# EAGLE board RFboardLeiden48_V_0.4 (EAGLE 7.6.0), part 1 of 2
AUTHOR: Kirchschlager Raimund
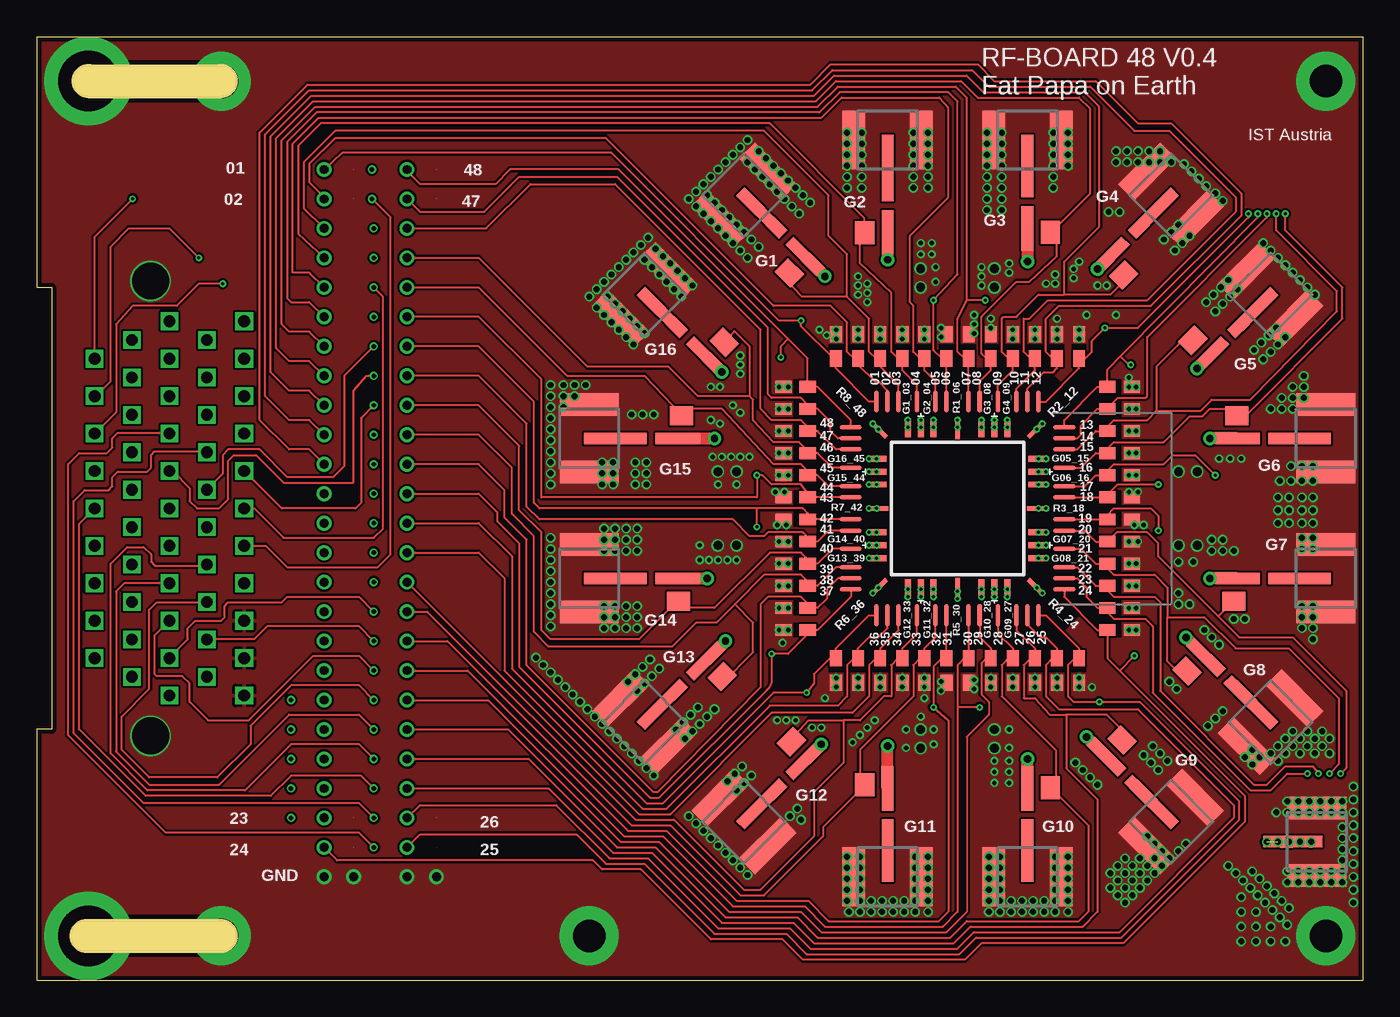
[diagram p0: board, top side]
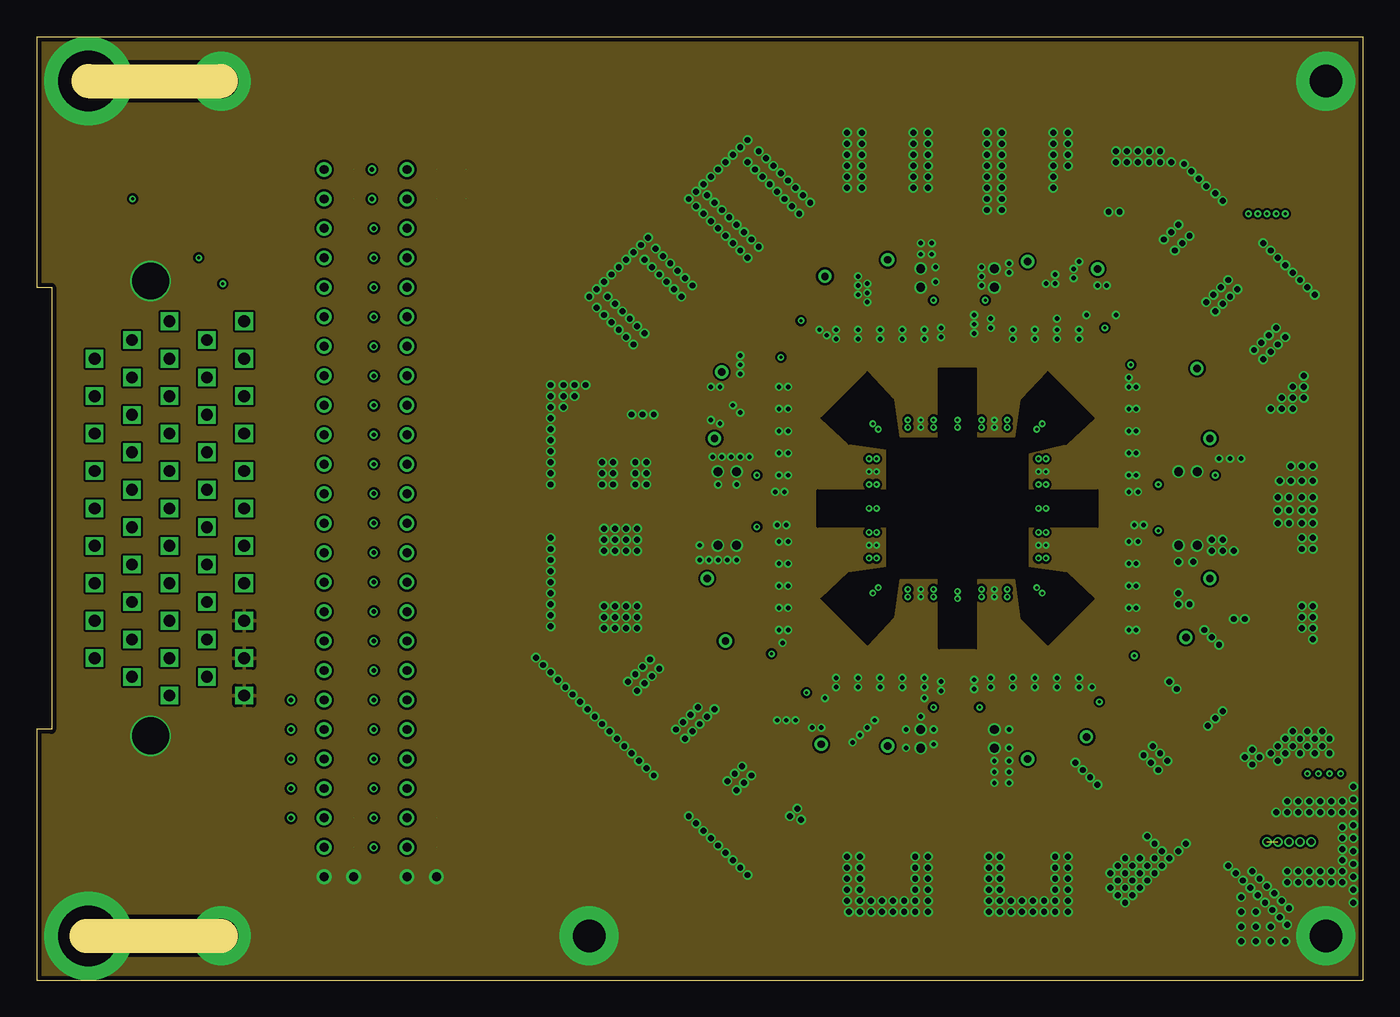
[diagram p1: board, inner layer GND1]
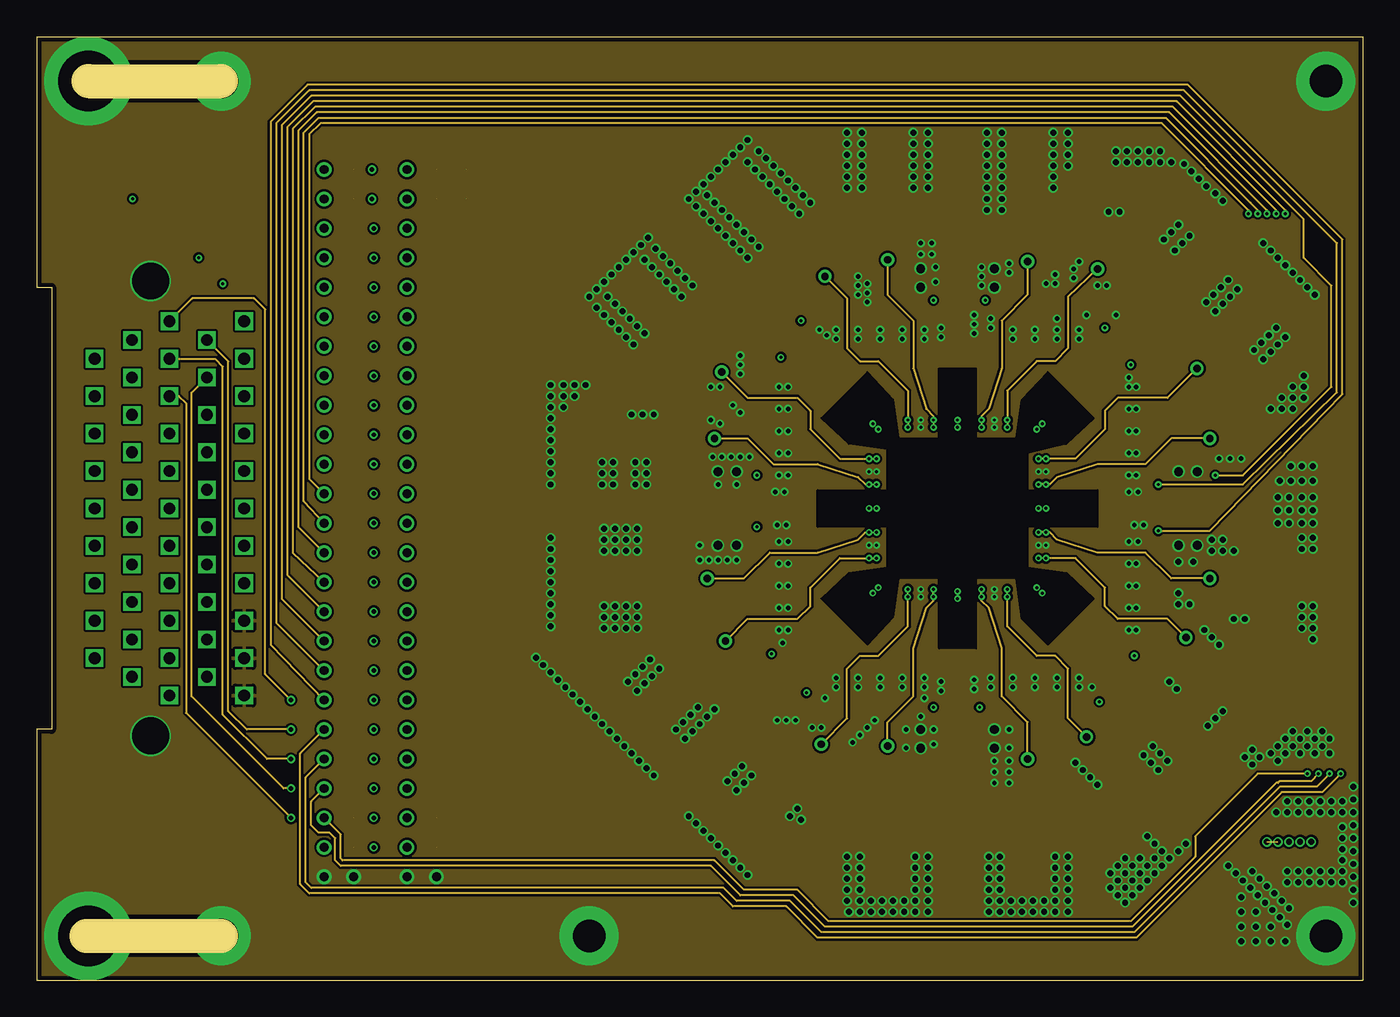
[diagram p2: board, inner layer FAST_GATES]
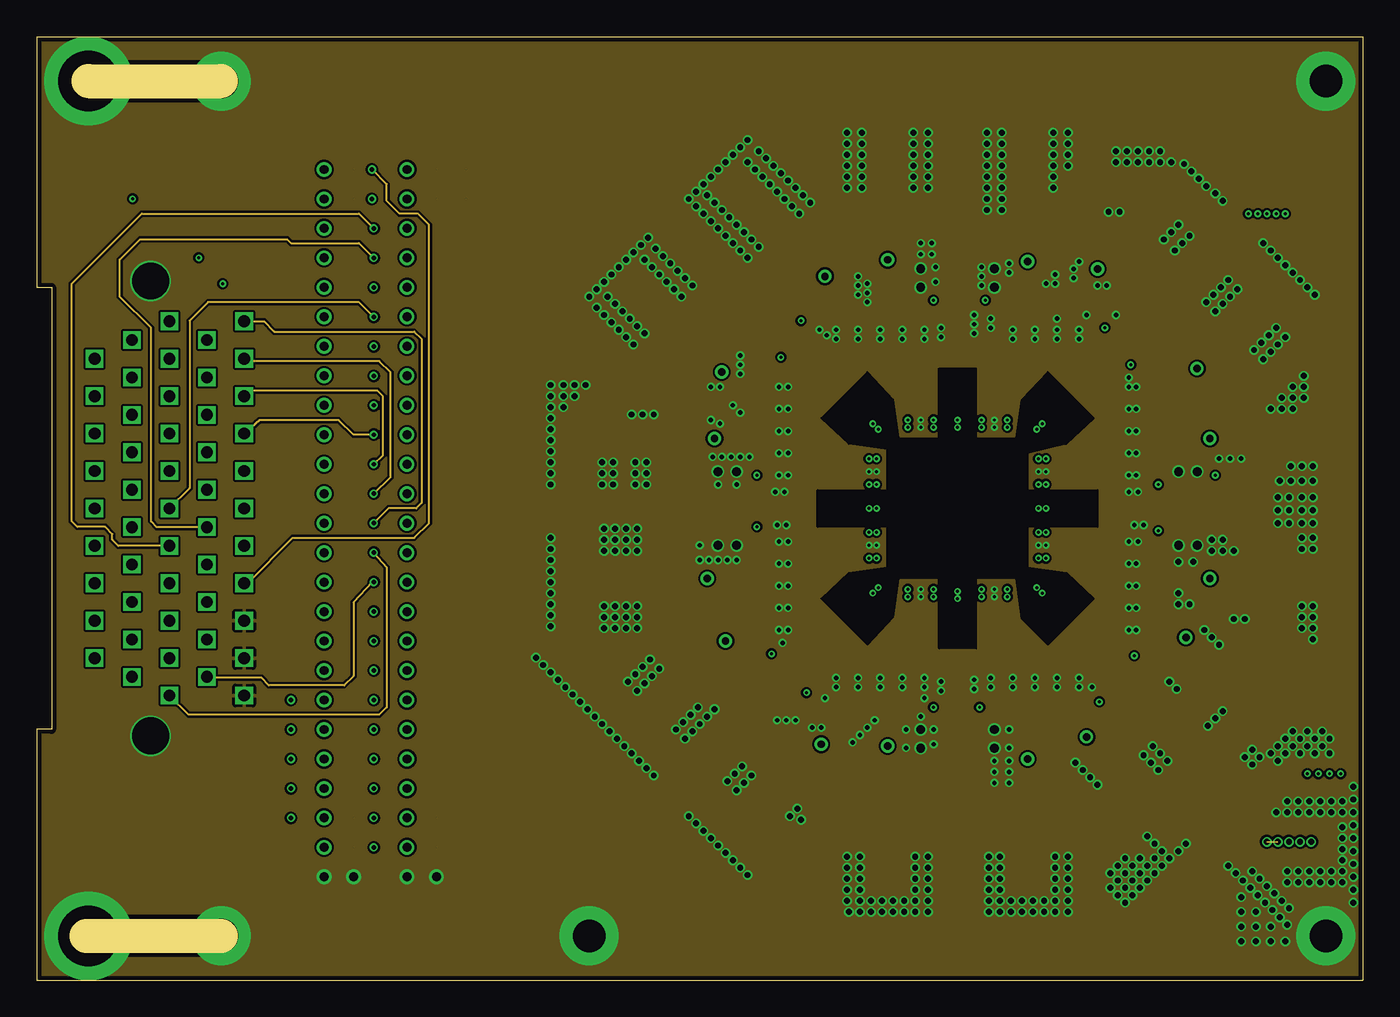
[diagram p3: board, inner layer GND2]
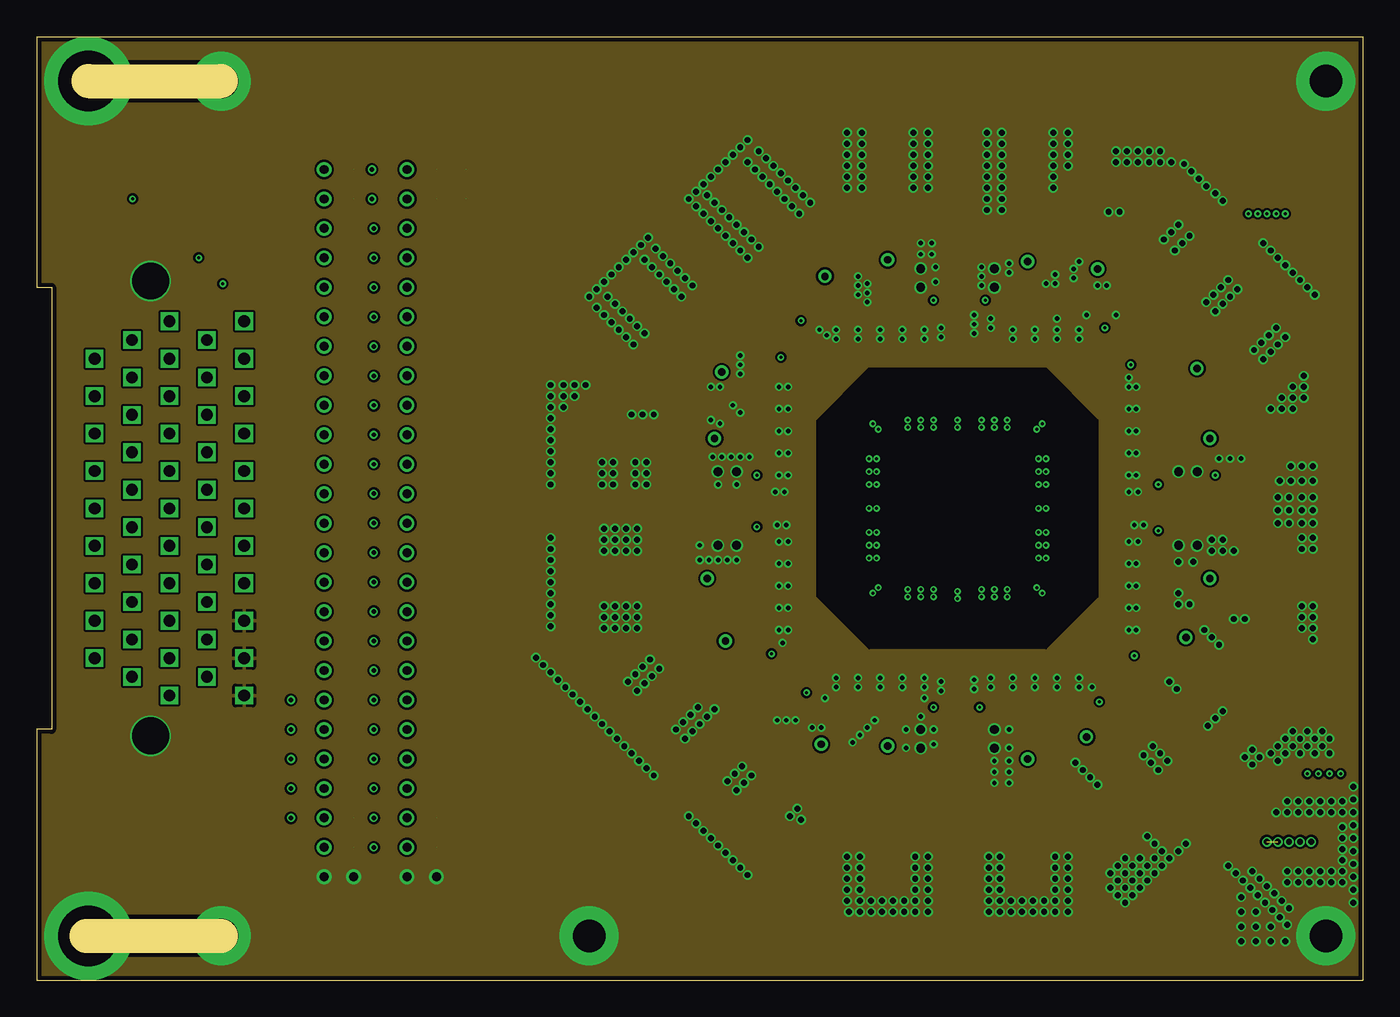
[diagram p4: board, inner layer GND_REFLECTOMETRY]
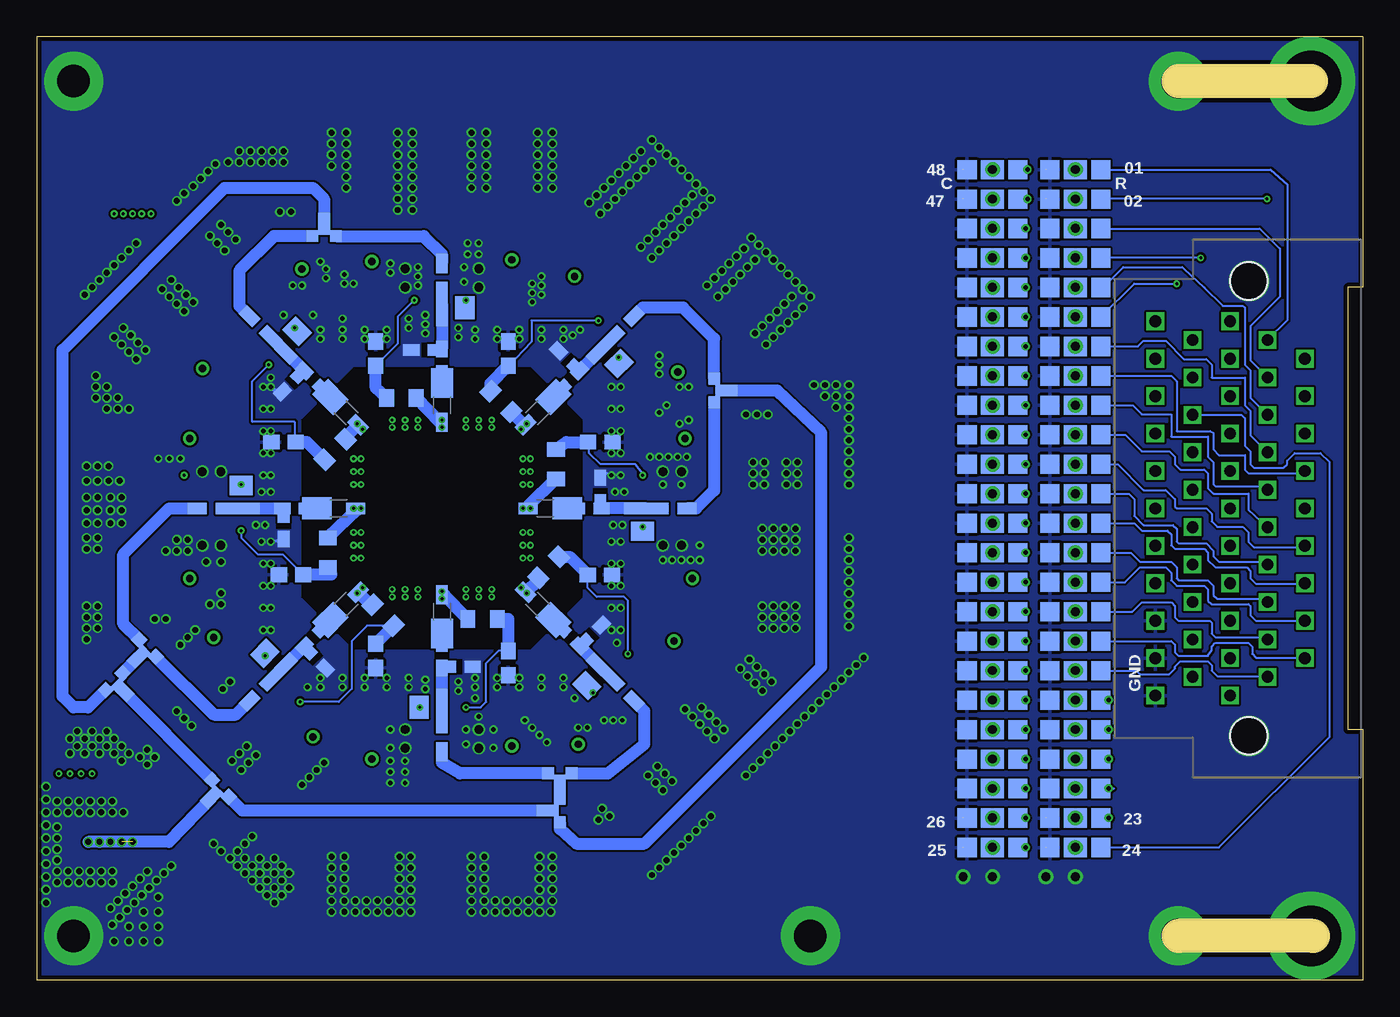
[diagram p5: board, bottom side, seen from below]

Size 90 x 64 mm. Coordinates in mm from the lower left corner, seen from the top.
Outline: 3.38,3 12.5,3
Outline: 3.5,61 12.5,61
Outline: 0,64 0,47 1,47 1,17 0,17 0,0 90,0 90,64 0,64
Copper layers [2:[3:(1+2+3*14+15+16)]]: TOP 0.035mm / dielectric 0.4mm / GND1 0.035mm / dielectric 0.2mm / FAST_GATES 0.035mm / dielectric 0.2mm / GND2 0.035mm / dielectric 0.2mm / GND_REFLECTOMETRY 0.035mm / dielectric 0.4mm / REFLECTOMETRY 0.035mm
Design rules "PCB-POOL HighSpec_ML6+ *": minimum track width 0.125mm, minimum drill 0.2mm, track to track 0.125mm, track to pad 0.125mm, pad to pad 0.125mm, via to via 0.125mm, smd to smd 0.125mm, copper to edge 0.3mm, drill to drill 0.2mm, minimum pad ring 0.2mm, minimum via ring 0.125mm, stop-mask expansion 0.065mm, vias tented up to drill 0.5mm, thermal gap 0.2mm
Net classes: 0 GND: clearance 0.15 mm; 1 HF: width 0.15 mm, clearance 0.25 mm; 2 REFL: width 0.8 mm, clearance 0.8 mm

## Footprints (pad centres in the part's own frame; a part is rotated, then mirrored left to right if it is on the bottom)
BIAS_TEE_UP_0603 = smd 1.3 x 0.8: HF 3.25,0 | smd 1.55 x 1.3: LF 0.25,-1.55 | smd 3 x 0.8: OUT 0.5,0
BIAS_TEE_DOWN_0603 = smd 1.3 x 0.8: HF 3.25,0 | smd 1.55 x 1.3: LF 0.45,1.55 | smd 3 x 0.8: OUT 0.5,0
L_MATCH = smd 2 x 1.5: IN 1.5,0 | smd 1.3 x 0.8: OUT -1.15,0
LP-FILTER/1_STAGE/OS/0603_TOP = smd 1.3 x 1.3: $1 -1.6,0.01; $6 1.85,0.01 | smd 1.55 x 1.3: $4 0.125,0.01
SMP_STRAIGHT_MINI_WIDE = smd 0.8 x 4: 1 0,1.653 | smd 1.524 x 4: 2@1 -2.292,0; 2@2 2.292,0
48DC+24RF_V3.0 = smd 0.3 x 1.5: DC§1 -5.5,7.25; DC§2 -4.75,7.25; DC§3 -4,7.25; DC§4 -2.75,7.25; DC§5 -1.5,7.25; DC§6 -0.75,7.25; DC§7 0.75,7.25; DC§8 1.5,7.25; DC§9 2.75,7.25; DC§10 4,7.25; DC§11 4.75,7.25; DC§12 5.5,7.25; DC§25 5.5,-7.25; DC§26 4.75,-7.25; DC§27 4,-7.25; DC§28 2.75,-7.25; DC§29 1.5,-7.25; DC§30 0.75,-7.25; DC§31 -0.75,-7.25; DC§32 -1.5,-7.25; DC§33 -2.75,-7.25; DC§34 -4,-7.25; DC§35 -4.75,-7.25; DC§36 -5.5,-7.25; RF$06_R1 0,5.45; RF$30_R5 0,-5.45 | smd 1.5 x 0.3: DC§13 7.25,5.5; DC§14 7.25,4.75; DC§15 7.25,4; DC§16 7.25,2.75; DC§17 7.25,1.5; DC§18 7.25,0.75; DC§19 7.25,-0.75; DC§20 7.25,-1.5; DC§21 7.25,-2.75; DC§22 7.25,-4; DC§23 7.25,-4.75; DC§24 7.25,-5.5; DC§37 -7.25,-5.5; DC§38 -7.25,-4.75; DC§39 -7.25,-4; DC§40 -7.25,-2.75; DC§41 -7.25,-1.5; DC§42 -7.25,-0.75; DC§43 -7.25,0.75; DC§44 -7.25,1.5; DC§45 -7.25,2.75; DC§46 -7.25,4; DC§47 -7.25,4.75; DC§48 -7.25,5.5; RF$18_R3 5.45,0; RF$42_R7 -5.45,0 | smd 0.4 x 1.27: RF$03_G1 -3.375,5.45; RF$04_G2 -1.625,5.45; RF$08_G3 1.625,5.45; RF$09_G4 3.375,5.45; RF$27_G9 3.375,-5.45; RF$28_G10 1.625,-5.45; RF$32_G11 -1.625,-5.45; RF$33_G12 -3.375,-5.45; RF$GND -2.5,5.45; RF$GND1 2.5,5.45; RF$GND4 2.5,-5.45; RF$GND5 -2.5,-5.45 | smd 1.5 x 0.3 rotated 45: RF$12_R2 5.35,5.35; RF$36_R6 -5.35,-5.35 | smd 1.27 x 0.4: RF$15_G5 5.45,3.375; RF$16_G6 5.45,1.625; RF$20_G7 5.45,-1.625; RF$21_G8 5.45,-3.375; RF$39_G13 -5.45,-3.375; RF$40_G14 -5.45,-1.625; RF$44_G15 -5.45,1.625; RF$45_G16 -5.45,3.375; RF$GND2 5.45,2.5; RF$GND3 5.45,-2.5; RF$GND6 -5.45,-2.5; RF$GND7 -5.45,2.5 | smd 1.5 x 0.3 rotated 135: RF$24_R4 5.35,-5.35; RF$48_R8 -5.35,5.35
T_JUNCTION_0.3MM = smd 0.8 x 1.5 bottom: P$1 0,-0.81 | smd 0.8 x 0.8 bottom: P$2 -0.8,0.02; P$3 0.8,0.02 | smd 1 x 0.32 bottom: P$4 0,-0.22
LP-FILTER/CAPACITOR/0603_BOTTOM = smd 1.1 x 0.8 bottom: IN -0.825,0; OUT 0.825,0
LP-FILTER/VARACTOR_V2 = smd 1 x 1.2 bottom: OUT 1,0; OUT1 -1,0
LP-FILTER/CAPACITOR/0603_BOTTOM_V2 = smd 1.1 x 1 bottom: IN -0.825,0; OUT 0.825,0
51_PIN_M83513/11-G = drill 0.8 square: 1 -11.43,2.54; 2 -10.16,5.08; 3 -8.89,2.54; 4 -7.62,5.08; 5 -6.35,2.54; 6 -5.08,5.08; 7 -3.81,2.54; 8 -2.54,5.08; 9 -1.27,2.54; 10 1.27,2.54; 11 2.54,5.08; 12 3.81,2.54; 13 5.08,5.08; 14 6.35,2.54; 15 7.62,5.08; 16 8.89,2.54; 17 10.16,5.08; 18 11.43,2.54; 19 -12.7,0; 20 -11.43,-2.54; 21 -10.16,0; 22 -8.89,-2.54; 23 -7.62,0; 24 -6.35,-2.54; 25 -5.08,0; 26 -3.81,-2.54; 27 0,5.08; 28 3.81,-2.54; 29 5.08,0; 30 6.35,-2.54; 31 7.62,0; 32 8.89,-2.54; 33 10.16,0; 34 11.43,-2.54; 35 12.7,0; 36 -12.7,-5.08; 37 -10.16,-5.08; 38 -7.62,-5.08; 39 -5.08,-5.08; 40 -2.54,-5.08; 41 -2.54,0; 42 -1.27,-2.54; 43 0,0; 44 0,-5.08; 45 1.27,-2.54; 46 2.54,0; 47 2.54,-5.08; 48 5.08,-5.08; 49 7.62,-5.08; 50 10.16,-5.08; 51 12.7,-5.08

## Placement (x,y rotation side)
B$1  BIASTEEUP1  [BIAS_TEE_UP_0603]  51.75,42.75 45 bottom
B$2  BIASTEEUP1  [BIAS_TEE_UP_0603]  62.5,45.38 90 bottom
B$3  BIASTEEUP1  [BIAS_TEE_UP_0603]  73.25,42.75 135 bottom
B$4  BIASTEEUP1  [BIAS_TEE_UP_0603]  75.88,32 180 bottom
B$5  BIASTEEUP1  [BIAS_TEE_UP_0603]  73.25,21.25 225 bottom
B$6  BIASTEEDOWN1  [BIAS_TEE_DOWN_0603]  52.5,48.75 135 top
B$7  BIASTEEUP1  [BIAS_TEE_UP_0603]  49.12,32 0 bottom
B$8  BIASTEEUP1  [BIAS_TEE_UP_0603]  62.5,18.75 270 bottom
B$9  BIASTEEUP1  [BIAS_TEE_UP_0603]  51.75,21.25 315 bottom
B$10  BIASTEEDOWN1  [BIAS_TEE_DOWN_0603]  72.25,15.5 315 top
B$11  BIASTEEDOWN1  [BIAS_TEE_DOWN_0603]  57.75,50.25 90 top
B$12  BIASTEEUP1  [BIAS_TEE_UP_0603]  67.25,50.5 90 top
B$13  BIASTEEUP1  [BIAS_TEE_UP_0603]  72.5,48.75 45 top
B$14  BIASTEEDOWN1  [BIAS_TEE_DOWN_0603]  79.25,42 45 top
B$15  BIASTEEDOWN1  [BIAS_TEE_DOWN_0603]  81,36.75 0 top
B$16  BIASTEEUP1  [BIAS_TEE_UP_0603]  81,27.25 0 top
B$17  BIASTEEUP1  [BIAS_TEE_UP_0603]  79,22.25 315 top
B$18  BIASTEEDOWN1  [BIAS_TEE_DOWN_0603]  67.25,13.5 270 top
B$19  BIASTEEUP1  [BIAS_TEE_UP_0603]  57.75,13.5 270 top
B$20  BIASTEEUP1  [BIAS_TEE_UP_0603]  52.5,15.25 225 top
B$21  BIASTEEDOWN1  [BIAS_TEE_DOWN_0603]  45.75,22 225 top
B$22  BIASTEEDOWN1  [BIAS_TEE_DOWN_0603]  44,27.25 180 top
B$23  BIASTEEUP1  [BIAS_TEE_UP_0603]  44,36.75 180 top
B$24  BIASTEEUP1  [BIAS_TEE_UP_0603]  45.75,42 135 top
L$1  L_MATCH  [L_MATCH]  55.5,32 0 bottom
L$2  L_MATCH  [L_MATCH]  56,38.5 45 bottom
L$3  L_MATCH  [L_MATCH]  62.5,39 90 bottom
L$4  L_MATCH  [L_MATCH]  69,38.5 135 bottom
L$5  L_MATCH  [L_MATCH]  69.5,32 180 bottom
L$6  L_MATCH  [L_MATCH]  69,25.5 225 bottom
L$7  L_MATCH  [L_MATCH]  62.5,25 270 bottom
L$8  L_MATCH  [L_MATCH]  56,25.5 315 bottom
LP$1  LP-FILTER/1-STAGETOP  [LP-FILTER/1_STAGE/OS/0603_TOP]  19.38,55 180 bottom
LP$2  LP-FILTER/1-STAGETOP  [LP-FILTER/1_STAGE/OS/0603_TOP]  19.38,53 180 bottom
LP$3  LP-FILTER/1-STAGETOP  [LP-FILTER/1_STAGE/OS/0603_TOP]  19.38,51 180 bottom
LP$4  LP-FILTER/1-STAGETOP  [LP-FILTER/1_STAGE/OS/0603_TOP]  19.38,49 180 bottom
LP$5  LP-FILTER/1-STAGETOP  [LP-FILTER/1_STAGE/OS/0603_TOP]  19.38,47 180 bottom
LP$6  LP-FILTER/1-STAGETOP  [LP-FILTER/1_STAGE/OS/0603_TOP]  19.38,45 180 bottom
LP$7  LP-FILTER/1-STAGETOP  [LP-FILTER/1_STAGE/OS/0603_TOP]  19.38,43 180 bottom
LP$8  LP-FILTER/1-STAGETOP  [LP-FILTER/1_STAGE/OS/0603_TOP]  19.38,41 180 bottom
LP$9  LP-FILTER/1-STAGETOP  [LP-FILTER/1_STAGE/OS/0603_TOP]  19.38,39 180 bottom
LP$10  LP-FILTER/1-STAGETOP  [LP-FILTER/1_STAGE/OS/0603_TOP]  19.38,37 180 bottom
LP$11  LP-FILTER/1-STAGETOP  [LP-FILTER/1_STAGE/OS/0603_TOP]  19.38,35 180 bottom
LP$12  LP-FILTER/1-STAGETOP  [LP-FILTER/1_STAGE/OS/0603_TOP]  19.38,33 180 bottom
LP$13  LP-FILTER/1-STAGETOP  [LP-FILTER/1_STAGE/OS/0603_TOP]  19.38,31 180 bottom
LP$14  LP-FILTER/1-STAGETOP  [LP-FILTER/1_STAGE/OS/0603_TOP]  19.38,29 180 bottom
LP$15  LP-FILTER/1-STAGETOP  [LP-FILTER/1_STAGE/OS/0603_TOP]  19.38,27 180 bottom
LP$16  LP-FILTER/1-STAGETOP  [LP-FILTER/1_STAGE/OS/0603_TOP]  19.38,25 180 bottom
LP$17  LP-FILTER/1-STAGETOP  [LP-FILTER/1_STAGE/OS/0603_TOP]  19.38,23 180 bottom
LP$18  LP-FILTER/1-STAGETOP  [LP-FILTER/1_STAGE/OS/0603_TOP]  19.38,21 180 bottom
LP$19  LP-FILTER/1-STAGETOP  [LP-FILTER/1_STAGE/OS/0603_TOP]  19.38,19 180 bottom
LP$20  LP-FILTER/1-STAGETOP  [LP-FILTER/1_STAGE/OS/0603_TOP]  19.38,17 180 bottom
LP$21  LP-FILTER/1-STAGETOP  [LP-FILTER/1_STAGE/OS/0603_TOP]  19.38,15 180 bottom
LP$22  LP-FILTER/1-STAGETOP  [LP-FILTER/1_STAGE/OS/0603_TOP]  19.38,13 180 bottom
LP$23  LP-FILTER/1-STAGETOP  [LP-FILTER/1_STAGE/OS/0603_TOP]  19.38,11 180 bottom
LP$24  LP-FILTER/1-STAGETOP  [LP-FILTER/1_STAGE/OS/0603_TOP]  19.38,9 180 bottom
LP$25  LP-FILTER/1-STAGETOP  [LP-FILTER/1_STAGE/OS/0603_TOP]  25,9 180 bottom
LP$26  LP-FILTER/1-STAGETOP  [LP-FILTER/1_STAGE/OS/0603_TOP]  25,11 180 bottom
LP$27  LP-FILTER/1-STAGETOP  [LP-FILTER/1_STAGE/OS/0603_TOP]  25,13 180 bottom
LP$28  LP-FILTER/1-STAGETOP  [LP-FILTER/1_STAGE/OS/0603_TOP]  25,15 180 bottom
LP$29  LP-FILTER/1-STAGETOP  [LP-FILTER/1_STAGE/OS/0603_TOP]  25,17 180 bottom
LP$30  LP-FILTER/1-STAGETOP  [LP-FILTER/1_STAGE/OS/0603_TOP]  25,19 180 bottom
LP$31  LP-FILTER/1-STAGETOP  [LP-FILTER/1_STAGE/OS/0603_TOP]  25,21 180 bottom
LP$32  LP-FILTER/1-STAGETOP  [LP-FILTER/1_STAGE/OS/0603_TOP]  25,23 180 bottom
LP$33  LP-FILTER/1-STAGETOP  [LP-FILTER/1_STAGE/OS/0603_TOP]  25,25 180 bottom
LP$34  LP-FILTER/1-STAGETOP  [LP-FILTER/1_STAGE/OS/0603_TOP]  25,27 180 bottom
LP$35  LP-FILTER/1-STAGETOP  [LP-FILTER/1_STAGE/OS/0603_TOP]  25,29 180 bottom
LP$36  LP-FILTER/1-STAGETOP  [LP-FILTER/1_STAGE/OS/0603_TOP]  25,31 180 bottom
LP$37  LP-FILTER/1-STAGETOP  [LP-FILTER/1_STAGE/OS/0603_TOP]  25,33 180 bottom
LP$38  LP-FILTER/1-STAGETOP  [LP-FILTER/1_STAGE/OS/0603_TOP]  25,35 180 bottom
LP$39  LP-FILTER/1-STAGETOP  [LP-FILTER/1_STAGE/OS/0603_TOP]  25,37 180 bottom
LP$40  LP-FILTER/1-STAGETOP  [LP-FILTER/1_STAGE/OS/0603_TOP]  25,39 180 bottom
LP$41  LP-FILTER/1-STAGETOP  [LP-FILTER/1_STAGE/OS/0603_TOP]  25,41 180 bottom
LP$42  LP-FILTER/1-STAGETOP  [LP-FILTER/1_STAGE/OS/0603_TOP]  25,43 180 bottom
LP$43  LP-FILTER/1-STAGETOP  [LP-FILTER/1_STAGE/OS/0603_TOP]  25,45 180 bottom
LP$44  LP-FILTER/1-STAGETOP  [LP-FILTER/1_STAGE/OS/0603_TOP]  25,47 180 bottom
LP$45  LP-FILTER/1-STAGETOP  [LP-FILTER/1_STAGE/OS/0603_TOP]  25,49 180 bottom
LP$46  LP-FILTER/1-STAGETOP  [LP-FILTER/1_STAGE/OS/0603_TOP]  25,51 180 bottom
LP$47  LP-FILTER/1-STAGETOP  [LP-FILTER/1_STAGE/OS/0603_TOP]  25,53 180 bottom
LP$48  LP-FILTER/1-STAGETOP  [LP-FILTER/1_STAGE/OS/0603_TOP]  25,55 180 bottom
S$1  MC-921WIDE  [SMP_STRAIGHT_MINI_WIDE]  48,53.25 225 top
S$2  MC-921WIDE  [SMP_STRAIGHT_MINI_WIDE]  77,10.75 45 top
S$3  MC-921WIDE  [SMP_STRAIGHT_MINI_WIDE]  67.25,7 0 top
S$4  MC-921WIDE  [SMP_STRAIGHT_MINI_WIDE]  57.75,7 0 top
S$5  MC-921WIDE  [SMP_STRAIGHT_MINI_WIDE]  86.9,9.39 90 top
S$6  MC-921WIDE  [SMP_STRAIGHT_MINI_WIDE]  48,10.75 315 top
S$7  MC-921WIDE  [SMP_STRAIGHT_MINI_WIDE]  41.25,17.5 315 top
S$8  MC-921WIDE  [SMP_STRAIGHT_MINI_WIDE]  57.75,57 180 top
S$9  MC-921WIDE  [SMP_STRAIGHT_MINI_WIDE]  67.25,57 180 top
S$10  MC-921WIDE  [SMP_STRAIGHT_MINI_WIDE]  77,53.25 135 top
S$11  MC-921WIDE  [SMP_STRAIGHT_MINI_WIDE]  83.75,46.5 135 top
S$12  MC-921WIDE  [SMP_STRAIGHT_MINI_WIDE]  87.5,36.75 90 top
S$13  MC-921WIDE  [SMP_STRAIGHT_MINI_WIDE]  87.5,27.25 90 top
S$14  MC-921WIDE  [SMP_STRAIGHT_MINI_WIDE]  83.75,17.5 45 top
S$15  MC-921WIDE  [SMP_STRAIGHT_MINI_WIDE]  37.5,27.25 270 top
S$16  MC-921WIDE  [SMP_STRAIGHT_MINI_WIDE]  37.5,36.75 270 top
S$17  MC-921WIDE  [SMP_STRAIGHT_MINI_WIDE]  41.25,46.5 225 top
U$1  48DC+24RF_V3.0  [48DC+24RF_V3.0]  62.5,32 0 top
U$2  TJUNCTION  [T_JUNCTION_0.3MM]  44,40 270 top
U$3  TJUNCTION  [T_JUNCTION_0.3MM]  54.52,11.5 90 top
U$4  TJUNCTION  [T_JUNCTION_0.3MM]  77.55,12.99 45 top
U$5  TJUNCTION  [T_JUNCTION_0.3MM]  84.73,20.23 315 top
U$6  TJUNCTION  [T_JUNCTION_0.3MM]  70.5,50.5 180 top
U$7  LP-FILTER/CAPACITOR/0603THIN  [LP-FILTER/CAPACITOR/0603_BOTTOM]  51.75,33.25 90 top
U$8  TJUNCTION  [T_JUNCTION_0.3MM]  82.5,22.5 45 top
U$9  TJUNCTION  [T_JUNCTION_0.3MM]  54.5,14 0 top
U$10  LP-FILTER/CAPACITOR/0603THIN  [LP-FILTER/CAPACITOR/0603_BOTTOM]  54,42.12 45 top
U$11  LP-FILTER/VARACTOR_V2  [LP-FILTER/VARACTOR_V2]  58.5,39.25 225 top
U$12  LP-FILTER/CAPACITOR/0603NORMAL  [LP-FILTER/CAPACITOR/0603_BOTTOM_V2]  58,42.5 270 top
U$13  LP-FILTER/CAPACITOR/0603THIN  [LP-FILTER/CAPACITOR/0603_BOTTOM]  53.75,40.75 135 top
U$14  LP-FILTER/VARACTOR_V2  [LP-FILTER/VARACTOR_V2]  54.75,35 270 top
U$15  LP-FILTER/CAPACITOR/0603NORMAL  [LP-FILTER/CAPACITOR/0603_BOTTOM_V2]  51.75,36.5 0 top
U$16  LP-FILTER/CAPACITOR/0603THIN  [LP-FILTER/CAPACITOR/0603_BOTTOM]  63.75,42.75 0 top
U$17  LP-FILTER/CAPACITOR/0603THIN  [LP-FILTER/CAPACITOR/0603_BOTTOM]  52.5,32 180 top
U$18  LP-FILTER/VARACTOR_V2  [LP-FILTER/VARACTOR_V2]  65.25,39.5 180 top
U$19  LP-FILTER/CAPACITOR/0603NORMAL  [LP-FILTER/CAPACITOR/0603_BOTTOM_V2]  67,42.5 270 top
U$20  LP-FILTER/CAPACITOR/0603THIN  [LP-FILTER/CAPACITOR/0603_BOTTOM]  62.5,42 90 top
U$21  LP-FILTER/CAPACITOR/0603THIN  [LP-FILTER/CAPACITOR/0603_BOTTOM]  73.25,30.75 270 top
U$22  LP-FILTER/CAPACITOR/0603THIN  [LP-FILTER/CAPACITOR/0603_BOTTOM]  72.75,40.5 315 top
U$23  LP-FILTER/VARACTOR_V2  [LP-FILTER/VARACTOR_V2]  69.75,36 135 top
U$24  LP-FILTER/CAPACITOR/0603NORMAL  [LP-FILTER/CAPACITOR/0603_BOTTOM_V2]  73.25,36.5 180 top
U$25  [51_PIN_M83513/11-G]  9,32 270 bottom
U$26  LP-FILTER/CAPACITOR/0603THIN  [LP-FILTER/CAPACITOR/0603_BOTTOM]  71.25,40.75 45 top
U$27  LP-FILTER/VARACTOR_V2  [LP-FILTER/VARACTOR_V2]  70.25,29 90 top
U$28  LP-FILTER/CAPACITOR/0603NORMAL  [LP-FILTER/CAPACITOR/0603_BOTTOM_V2]  72.75,27.5 180 top
U$29  LP-FILTER/CAPACITOR/0603THIN  [LP-FILTER/CAPACITOR/0603_BOTTOM]  72.5,32 0 top
U$30  LP-FILTER/CAPACITOR/0603THIN  [LP-FILTER/CAPACITOR/0603_BOTTOM]  71,21.75 225 top
U$31  LP-FILTER/VARACTOR_V2  [LP-FILTER/VARACTOR_V2]  66.5,24.75 45 top
U$32  LP-FILTER/CAPACITOR/0603NORMAL  [LP-FILTER/CAPACITOR/0603_BOTTOM_V2]  67,22 90 top
U$33  LP-FILTER/CAPACITOR/0603THIN  [LP-FILTER/CAPACITOR/0603_BOTTOM]  71.25,23.25 315 top
U$34  LP-FILTER/CAPACITOR/0603THIN  [LP-FILTER/CAPACITOR/0603_BOTTOM]  61.25,21.25 180 top
U$35  LP-FILTER/VARACTOR_V2  [LP-FILTER/VARACTOR_V2]  59.75,24.5 0 top
U$36  LP-FILTER/CAPACITOR/0603NORMAL  [LP-FILTER/CAPACITOR/0603_BOTTOM_V2]  58,21.5 90 top
U$37  LP-FILTER/CAPACITOR/0603THIN  [LP-FILTER/CAPACITOR/0603_BOTTOM]  62.5,22 270 top
U$38  LP-FILTER/CAPACITOR/0603THIN  [LP-FILTER/CAPACITOR/0603_BOTTOM]  52.25,23.5 135 top
U$39  LP-FILTER/VARACTOR_V2  [LP-FILTER/VARACTOR_V2]  55.25,28 315 top
U$40  LP-FILTER/CAPACITOR/0603NORMAL  [LP-FILTER/CAPACITOR/0603_BOTTOM_V2]  51.77,27.49 0 top
U$41  LP-FILTER/CAPACITOR/0603THIN  [LP-FILTER/CAPACITOR/0603_BOTTOM]  53.75,23.25 225 top
U$42  LP-FILTER/CAPACITOR/0603THIN  [LP-FILTER/CAPACITOR/0603_BOTTOM]  54.25,43 270 bottom
U$43  LP-FILTER/CAPACITOR/0603THIN  [LP-FILTER/CAPACITOR/0603_BOTTOM]  55.75,43 270 bottom
U$44  LP-FILTER/CAPACITOR/0603THIN  [LP-FILTER/CAPACITOR/0603_BOTTOM]  57.25,43 270 bottom
U$45  LP-FILTER/CAPACITOR/0603THIN  [LP-FILTER/CAPACITOR/0603_BOTTOM]  58.75,43 270 bottom
U$46  LP-FILTER/CAPACITOR/0603THIN  [LP-FILTER/CAPACITOR/0603_BOTTOM]  60.25,43 270 bottom
U$47  LP-FILTER/CAPACITOR/0603THIN  [LP-FILTER/CAPACITOR/0603_BOTTOM]  61.75,43 270 bottom
U$48  LP-FILTER/CAPACITOR/0603THIN  [LP-FILTER/CAPACITOR/0603_BOTTOM]  63.25,43 270 bottom
U$49  LP-FILTER/CAPACITOR/0603THIN  [LP-FILTER/CAPACITOR/0603_BOTTOM]  64.75,43 270 bottom
U$50  LP-FILTER/CAPACITOR/0603THIN  [LP-FILTER/CAPACITOR/0603_BOTTOM]  66.25,43 270 bottom
U$51  LP-FILTER/CAPACITOR/0603THIN  [LP-FILTER/CAPACITOR/0603_BOTTOM]  67.75,43 270 bottom
U$52  LP-FILTER/CAPACITOR/0603THIN  [LP-FILTER/CAPACITOR/0603_BOTTOM]  69.25,43 270 bottom
U$53  LP-FILTER/CAPACITOR/0603THIN  [LP-FILTER/CAPACITOR/0603_BOTTOM]  70.75,43 270 bottom
U$54  LP-FILTER/CAPACITOR/0603THIN  [LP-FILTER/CAPACITOR/0603_BOTTOM]  73.5,40.25 180 bottom
U$55  LP-FILTER/CAPACITOR/0603THIN  [LP-FILTER/CAPACITOR/0603_BOTTOM]  73.5,38.75 180 bottom
U$56  LP-FILTER/CAPACITOR/0603THIN  [LP-FILTER/CAPACITOR/0603_BOTTOM]  73.5,37.25 180 bottom
U$57  LP-FILTER/CAPACITOR/0603THIN  [LP-FILTER/CAPACITOR/0603_BOTTOM]  73.5,35.75 180 bottom
U$58  LP-FILTER/CAPACITOR/0603THIN  [LP-FILTER/CAPACITOR/0603_BOTTOM]  73.5,34.25 180 bottom
U$59  LP-FILTER/CAPACITOR/0603THIN  [LP-FILTER/CAPACITOR/0603_BOTTOM]  73.5,32.75 180 bottom
U$60  LP-FILTER/CAPACITOR/0603THIN  [LP-FILTER/CAPACITOR/0603_BOTTOM]  73.5,31.25 180 bottom
U$61  LP-FILTER/CAPACITOR/0603THIN  [LP-FILTER/CAPACITOR/0603_BOTTOM]  73.5,29.75 180 bottom
U$62  LP-FILTER/CAPACITOR/0603THIN  [LP-FILTER/CAPACITOR/0603_BOTTOM]  73.5,28.25 180 bottom
U$63  LP-FILTER/CAPACITOR/0603THIN  [LP-FILTER/CAPACITOR/0603_BOTTOM]  73.5,26.75 180 bottom
U$64  LP-FILTER/CAPACITOR/0603THIN  [LP-FILTER/CAPACITOR/0603_BOTTOM]  73.5,25.25 180 bottom
U$65  LP-FILTER/CAPACITOR/0603THIN  [LP-FILTER/CAPACITOR/0603_BOTTOM]  73.5,23.75 180 bottom
U$66  LP-FILTER/CAPACITOR/0603THIN  [LP-FILTER/CAPACITOR/0603_BOTTOM]  70.75,21 270 bottom
U$67  LP-FILTER/CAPACITOR/0603THIN  [LP-FILTER/CAPACITOR/0603_BOTTOM]  69.25,21 270 bottom
U$68  LP-FILTER/CAPACITOR/0603THIN  [LP-FILTER/CAPACITOR/0603_BOTTOM]  67.75,21 270 bottom
U$69  LP-FILTER/CAPACITOR/0603THIN  [LP-FILTER/CAPACITOR/0603_BOTTOM]  66.25,21 270 bottom
U$70  LP-FILTER/CAPACITOR/0603THIN  [LP-FILTER/CAPACITOR/0603_BOTTOM]  64.75,21 270 bottom
U$71  LP-FILTER/CAPACITOR/0603THIN  [LP-FILTER/CAPACITOR/0603_BOTTOM]  63.25,21 270 bottom
U$72  LP-FILTER/CAPACITOR/0603THIN  [LP-FILTER/CAPACITOR/0603_BOTTOM]  61.75,21 270 bottom
U$73  LP-FILTER/CAPACITOR/0603THIN  [LP-FILTER/CAPACITOR/0603_BOTTOM]  60.25,21 270 bottom
U$74  LP-FILTER/CAPACITOR/0603THIN  [LP-FILTER/CAPACITOR/0603_BOTTOM]  58.75,21 270 bottom
U$75  LP-FILTER/CAPACITOR/0603THIN  [LP-FILTER/CAPACITOR/0603_BOTTOM]  57.25,21 270 bottom
U$76  LP-FILTER/CAPACITOR/0603THIN  [LP-FILTER/CAPACITOR/0603_BOTTOM]  55.75,21 270 bottom
U$77  LP-FILTER/CAPACITOR/0603THIN  [LP-FILTER/CAPACITOR/0603_BOTTOM]  54.25,21 270 bottom
U$78  LP-FILTER/CAPACITOR/0603THIN  [LP-FILTER/CAPACITOR/0603_BOTTOM]  51.5,23.75 0 bottom
U$79  LP-FILTER/CAPACITOR/0603THIN  [LP-FILTER/CAPACITOR/0603_BOTTOM]  51.5,25.25 0 bottom
U$80  LP-FILTER/CAPACITOR/0603THIN  [LP-FILTER/CAPACITOR/0603_BOTTOM]  51.5,26.75 0 bottom
U$81  LP-FILTER/CAPACITOR/0603THIN  [LP-FILTER/CAPACITOR/0603_BOTTOM]  51.5,28.25 0 bottom
U$82  LP-FILTER/CAPACITOR/0603THIN  [LP-FILTER/CAPACITOR/0603_BOTTOM]  51.5,29.75 0 bottom
U$83  LP-FILTER/CAPACITOR/0603THIN  [LP-FILTER/CAPACITOR/0603_BOTTOM]  51.5,31.25 0 bottom
U$84  LP-FILTER/CAPACITOR/0603THIN  [LP-FILTER/CAPACITOR/0603_BOTTOM]  51.5,32.75 0 bottom
U$85  LP-FILTER/CAPACITOR/0603THIN  [LP-FILTER/CAPACITOR/0603_BOTTOM]  51.5,34.25 0 bottom
U$86  LP-FILTER/CAPACITOR/0603THIN  [LP-FILTER/CAPACITOR/0603_BOTTOM]  51.5,35.75 0 bottom
U$87  LP-FILTER/CAPACITOR/0603THIN  [LP-FILTER/CAPACITOR/0603_BOTTOM]  51.5,37.25 0 bottom
U$88  LP-FILTER/CAPACITOR/0603THIN  [LP-FILTER/CAPACITOR/0603_BOTTOM]  51.5,38.75 0 bottom
U$89  LP-FILTER/CAPACITOR/0603THIN  [LP-FILTER/CAPACITOR/0603_BOTTOM]  51.5,40.25 0 bottom

## Library data of the parts
B$1-B$24 = Bias tee
L$1-L$8 = MatchCircuit
LP$1-LP$48 U$7 U$10-U$24 U$26-U$89 = LPFilter
S$1-S$17 = RF Connectors
U$1 = SampleArea
U$2-U$6 U$8 U$9 = RF layout parts
U$25 = Glenair

## Nets
DC$01: LP$1.$1 U$25.1
DC$02: LP$2.$1 U$25.2
DC$03: LP$3.$1 U$25.3
DC$04: LP$4.$1 U$25.4
DC$05: LP$5.$1 U$25.5
DC$06: LP$6.$1 U$25.6
DC$07: LP$7.$1 U$25.7
DC$08: LP$8.$1 U$25.8
DC$09: LP$9.$1 U$25.9
DC$10: LP$10.$1 U$25.10
DC$11: LP$11.$1 U$25.11
DC$12: LP$12.$1 U$25.12
DC$13: LP$13.$1 U$25.13
DC$14: LP$14.$1 U$25.14
DC$15: LP$15.$1 U$25.15
DC$16: LP$16.$1 U$25.16
DC$17: LP$17.$1 U$25.17
DC$18: LP$18.$1 U$25.18
DC$19: LP$19.$1 U$25.19
DC$20: LP$20.$1 U$25.20
DC$21: LP$21.$1 U$25.21
DC$22: LP$22.$1 U$25.22
DC$23: LP$23.$1 U$25.23
DC$24: LP$24.$1 U$25.24
DC$25: LP$25.$1 U$25.25
DC$26: LP$26.$1 U$25.26
DC$27: LP$27.$1 U$25.27
DC$28: LP$28.$1 U$25.28
DC$29: LP$29.$1 U$25.29
DC$30: LP$30.$1 U$25.30
DC$31: LP$31.$1 U$25.31
DC$32: LP$32.$1 U$25.32
DC$33: LP$33.$1 U$25.33
DC$34: LP$34.$1 U$25.34
DC$35: LP$35.$1 U$25.35
DC$36: LP$36.$1 U$25.36
DC$37: LP$37.$1 U$25.37
DC$38: LP$38.$1 U$25.38
DC$39: LP$39.$1 U$25.39
DC$40: LP$40.$1 U$25.40
DC$41: LP$41.$1 U$25.41
DC$42: LP$42.$1 U$25.42
DC$43: LP$43.$1 U$25.43
DC$44: LP$44.$1 U$25.44
DC$45: LP$45.$1 U$25.45
DC$46: LP$46.$1 U$25.46
DC$47: LP$47.$1 U$25.47
DC$48: LP$48.$1 U$25.48
DCF$01: LP$1.$4 U$1.DC§1 U$11.OUT1 U$12.OUT U$42.OUT
DCF$02: LP$2.$4 U$1.DC§2 U$43.OUT
DCF$03: B$6.LF LP$3.$4 U$1.DC§3 U$44.OUT
DCF$04: B$11.LF LP$4.$4 U$1.DC§4 U$45.OUT
DCF$05: LP$5.$4 U$1.DC§5 U$46.OUT
DCF$06: B$2.LF LP$6.$4 U$1.DC§6 U$47.OUT
DCF$07: LP$7.$4 U$1.DC§7 U$18.OUT1 U$19.OUT U$48.OUT
DCF$08: B$12.LF LP$8.$4 U$1.DC§8 U$49.OUT
DCF$09: B$13.LF LP$9.$4 U$1.DC§9 U$50.OUT
DCF$10: LP$10.$4 U$1.DC§10 U$51.OUT
DCF$11: LP$11.$4 U$1.DC§11 U$52.OUT
DCF$12: B$3.LF LP$12.$4 U$1.DC§12 U$53.OUT
DCF$13: LP$13.$4 U$1.DC§13 U$23.OUT1 U$24.OUT U$54.IN
DCF$14: LP$14.$4 U$1.DC§14 U$55.IN
DCF$15: B$14.LF LP$15.$4 U$1.DC§15 U$56.IN
DCF$16: B$15.LF LP$16.$4 U$1.DC§16 U$57.IN
DCF$17: LP$17.$4 U$1.DC§17 U$58.IN
DCF$18: B$4.LF LP$18.$4 U$1.DC§18 U$59.IN
DCF$19: LP$19.$4 U$1.DC§19 U$27.OUT1 U$28.OUT U$60.IN
DCF$20: B$16.LF LP$20.$4 U$1.DC§20 U$61.IN
DCF$21: B$17.LF LP$21.$4 U$1.DC§21 U$62.IN
DCF$22: LP$22.$4 U$1.DC§22 U$63.IN
DCF$23: LP$23.$4 U$1.DC§23 U$64.IN
DCF$24: B$5.LF LP$24.$4 U$1.DC§24 U$65.IN
DCF$25: LP$25.$4 U$1.DC§25 U$31.OUT1 U$32.OUT U$66.IN
DCF$26: LP$26.$4 U$1.DC§26 U$67.IN
DCF$27: B$10.LF LP$27.$4 U$1.DC§27 U$68.IN
DCF$28: B$18.LF LP$28.$4 U$1.DC§28 U$69.IN
DCF$29: LP$29.$4 U$1.DC§29 U$70.IN
DCF$30: B$8.LF LP$30.$4 U$1.DC§30 U$71.IN
DCF$31: LP$31.$4 U$1.DC§31 U$35.OUT1 U$36.OUT U$72.IN
DCF$32: B$19.LF LP$32.$4 U$1.DC§32 U$73.IN
DCF$33: B$20.LF LP$33.$4 U$1.DC§33 U$74.IN
DCF$34: LP$34.$4 U$1.DC§34 U$75.IN
DCF$35: LP$35.$4 U$1.DC§35 U$76.IN
DCF$36: B$9.LF LP$36.$4 U$1.DC§36 U$77.IN
DCF$37: LP$37.$4 U$1.DC§37 U$39.OUT1 U$40.OUT U$78.IN
DCF$38: LP$38.$4 U$1.DC§38 U$79.IN
DCF$39: B$21.LF LP$39.$4 U$1.DC§39 U$80.IN
DCF$40: B$22.LF LP$40.$4 U$1.DC§40 U$81.IN
DCF$41: LP$41.$4 U$1.DC§41 U$82.IN
DCF$42: B$7.LF LP$42.$4 U$1.DC§42 U$83.IN
DCF$43: LP$43.$4 U$1.DC§43 U$14.OUT1 U$15.OUT U$84.IN
DCF$44: B$23.LF LP$44.$4 U$1.DC§44 U$85.IN
DCF$45: B$24.LF LP$45.$4 U$1.DC§45 U$86.IN
DCF$46: LP$46.$4 U$1.DC§46 U$87.IN
DCF$47: LP$47.$4 U$1.DC§47 U$88.IN
DCF$48: B$1.LF LP$48.$4 U$1.DC§48 U$89.IN
GND: LP$1.$6 LP$2.$6 LP$3.$6 LP$4.$6 LP$5.$6 LP$6.$6 LP$7.$6 LP$8.$6 LP$9.$6 LP$10.$6 LP$11.$6 LP$12.$6 LP$13.$6 LP$14.$6 LP$15.$6 LP$16.$6 LP$17.$6 LP$18.$6 LP$19.$6 LP$20.$6 LP$21.$6 LP$22.$6 LP$23.$6 LP$24.$6 LP$25.$6 LP$26.$6 LP$27.$6 LP$28.$6 LP$29.$6 LP$30.$6 LP$31.$6 LP$32.$6 LP$33.$6 LP$34.$6 LP$35.$6 LP$36.$6 LP$37.$6 LP$38.$6 LP$39.$6 LP$40.$6 LP$41.$6 LP$42.$6 LP$43.$6 LP$44.$6 LP$45.$6 LP$46.$6 LP$47.$6 LP$48.$6 S$1.2@1 S$1.2@2 S$2.2@1 S$2.2@2 S$3.2@1 S$3.2@2 S$4.2@1 S$4.2@2 S$5.2@1 S$5.2@2 S$6.2@1 S$6.2@2 S$7.2@1 S$7.2@2 S$8.2@1 S$8.2@2 S$9.2@1 S$9.2@2 S$10.2@1 S$10.2@2 S$11.2@1 S$11.2@2 S$12.2@1 S$12.2@2 S$13.2@1 S$13.2@2 S$14.2@1 S$14.2@2 S$15.2@1 S$15.2@2 S$16.2@1 S$16.2@2 S$17.2@1 S$17.2@2 U$7.OUT U$10.OUT U$12.IN U$15.IN U$16.OUT U$19.IN U$21.OUT U$22.OUT U$24.IN U$25.49 U$25.50 U$25.51 U$28.IN U$30.OUT U$32.IN U$34.OUT U$36.IN U$38.OUT U$40.IN U$42.IN U$43.IN U$44.IN U$45.IN U$46.IN U$47.IN U$48.IN U$49.IN U$50.IN U$51.IN U$52.IN U$53.IN U$54.OUT U$55.OUT U$56.OUT U$57.OUT U$58.OUT U$59.OUT U$60.OUT U$61.OUT U$62.OUT U$63.OUT U$64.OUT U$65.OUT U$66.OUT U$67.OUT U$68.OUT U$69.OUT U$70.OUT U$71.OUT U$72.OUT U$73.OUT U$74.OUT U$75.OUT U$76.OUT U$77.OUT U$78.OUT U$79.OUT U$80.OUT U$81.OUT U$82.OUT U$83.OUT U$84.OUT U$85.OUT U$86.OUT U$87.OUT U$88.OUT U$89.OUT
N$1 [REFL]: B$6.HF S$1.1
N$2 [REFL]: L$1.IN U$17.IN
N$3 [REFL]: B$11.HF S$8.1
N$4 [REFL]: B$12.HF S$9.1
N$5 [HF]: B$14.OUT U$1.RF$15_G5
N$6 [HF]: B$15.OUT U$1.RF$16_G6
N$7 [REFL]: B$13.HF S$10.1
N$8 [REFL]: B$14.HF S$11.1
N$9 [REFL]: U$3.P$3 U$9.P$1
N$10 [REFL]: U$3.P$1 U$4.P$2
N$11 [REFL]: U$2.P$1 U$3.P$2
N$12 [HF]: B$16.OUT U$1.RF$20_G7
N$13 [REFL]: U$5.P$3 U$6.P$1
N$14 [REFL]: U$5.P$2 U$8.P$1
N$15 [REFL]: U$4.P$3 U$5.P$1
N$16 [HF]: B$17.OUT U$1.RF$21_G8
N$17 [REFL]: B$7.HF U$2.P$3
N$18 [REFL]: L$5.IN U$29.IN
N$20 [REFL]: L$2.IN U$13.IN
N$21 [REFL]: S$5.1 U$4.P$1
N$22 [REFL]: B$1.HF U$2.P$2
N$23 [REFL]: B$4.HF U$8.P$3
N$27 [REFL]: L$3.IN U$20.IN
N$28 [REFL]: B$15.HF S$12.1
N$29 [REFL]: B$16.HF S$13.1
N$30 [REFL]: B$17.HF S$14.1
N$31 [HF]: B$6.OUT U$1.RF$03_G1
N$32 [HF]: B$11.OUT U$1.RF$04_G2
N$33 [HF]: B$12.OUT U$1.RF$08_G3
N$34 [HF]: B$13.OUT U$1.RF$09_G4
N$35 [REFL]: B$2.HF U$6.P$3
N$38 [REFL]: L$4.IN U$26.IN
N$39 [REFL]: B$3.HF U$6.P$2
N$40 [REFL]: L$6.IN U$33.IN
N$41 [REFL]: B$5.HF U$8.P$2
N$43 [REFL]: L$7.IN U$37.IN
N$44 [REFL]: B$8.HF U$9.P$3
N$46 [REFL]: L$8.IN U$41.IN
N$47 [REFL]: B$9.HF U$9.P$2
N$48 [REFL]: B$10.HF S$2.1
N$49 [REFL]: B$18.HF S$3.1
N$50 [HF]: B$18.OUT U$1.RF$28_G10
N$51 [HF]: B$10.OUT U$1.RF$27_G9
N$52 [REFL]: B$19.HF S$4.1
N$53 [REFL]: B$20.HF S$6.1
N$54 [HF]: B$20.OUT U$1.RF$33_G12
N$55 [HF]: B$19.OUT U$1.RF$32_G11
N$56 [REFL]: B$21.HF S$7.1
N$57 [REFL]: B$22.HF S$15.1
N$58 [REFL]: B$23.HF S$16.1
N$59 [REFL]: B$24.HF S$17.1
N$60 [HF]: B$24.OUT U$1.RF$45_G16
N$61 [HF]: B$23.OUT U$1.RF$44_G15
N$62 [HF]: B$22.OUT U$1.RF$40_G14
N$63 [HF]: B$21.OUT U$1.RF$39_G13
RF$1 [REFL]: B$1.OUT U$10.IN U$13.OUT
RF$2 [REFL]: B$2.OUT U$16.IN U$20.OUT
RF$3 [REFL]: B$3.OUT U$22.IN U$26.OUT
RF$4 [REFL]: B$7.OUT U$7.IN U$17.OUT
RF$5 [REFL]: B$4.OUT U$21.IN U$29.OUT
RF$6 [REFL]: B$5.OUT U$30.IN U$33.OUT
RF$7 [REFL]: B$8.OUT U$34.IN U$37.OUT
RF$8 [REFL]: B$9.OUT U$38.IN U$41.OUT
RF$R1: L$3.OUT U$1.RF$06_R1 U$18.OUT
RF$R2: L$4.OUT U$1.RF$12_R2 U$23.OUT
RF$R3: L$5.OUT U$1.RF$18_R3 U$27.OUT
RF$R4: L$6.OUT U$1.RF$24_R4 U$31.OUT
RF$R5: L$7.OUT U$1.RF$30_R5 U$35.OUT
RF$R6: L$8.OUT U$1.RF$36_R6 U$39.OUT
RF$R7: L$1.OUT U$1.RF$42_R7 U$14.OUT
RF$R8: L$2.OUT U$1.RF$48_R8 U$11.OUT